# Altium PCB Copy of main - shifted.PcbDoc (part 12 of 15)
Units mil, origin at the board's own origin, x right, y up, seen from the top; angles counter-clockwise.
Board outline 8394.55 x 5164.44 mil, 7 copper layers (Top Layer 1, Layer 2, Layer 3, Unused, Layer 4_pow, Layer 5_gnd, Bottom 6+gnd), stack 46.112 mil thick; 363 components, 409 nets, 1750 pads, 991 vias.
Unrouted connection lines stored in the file: 111.
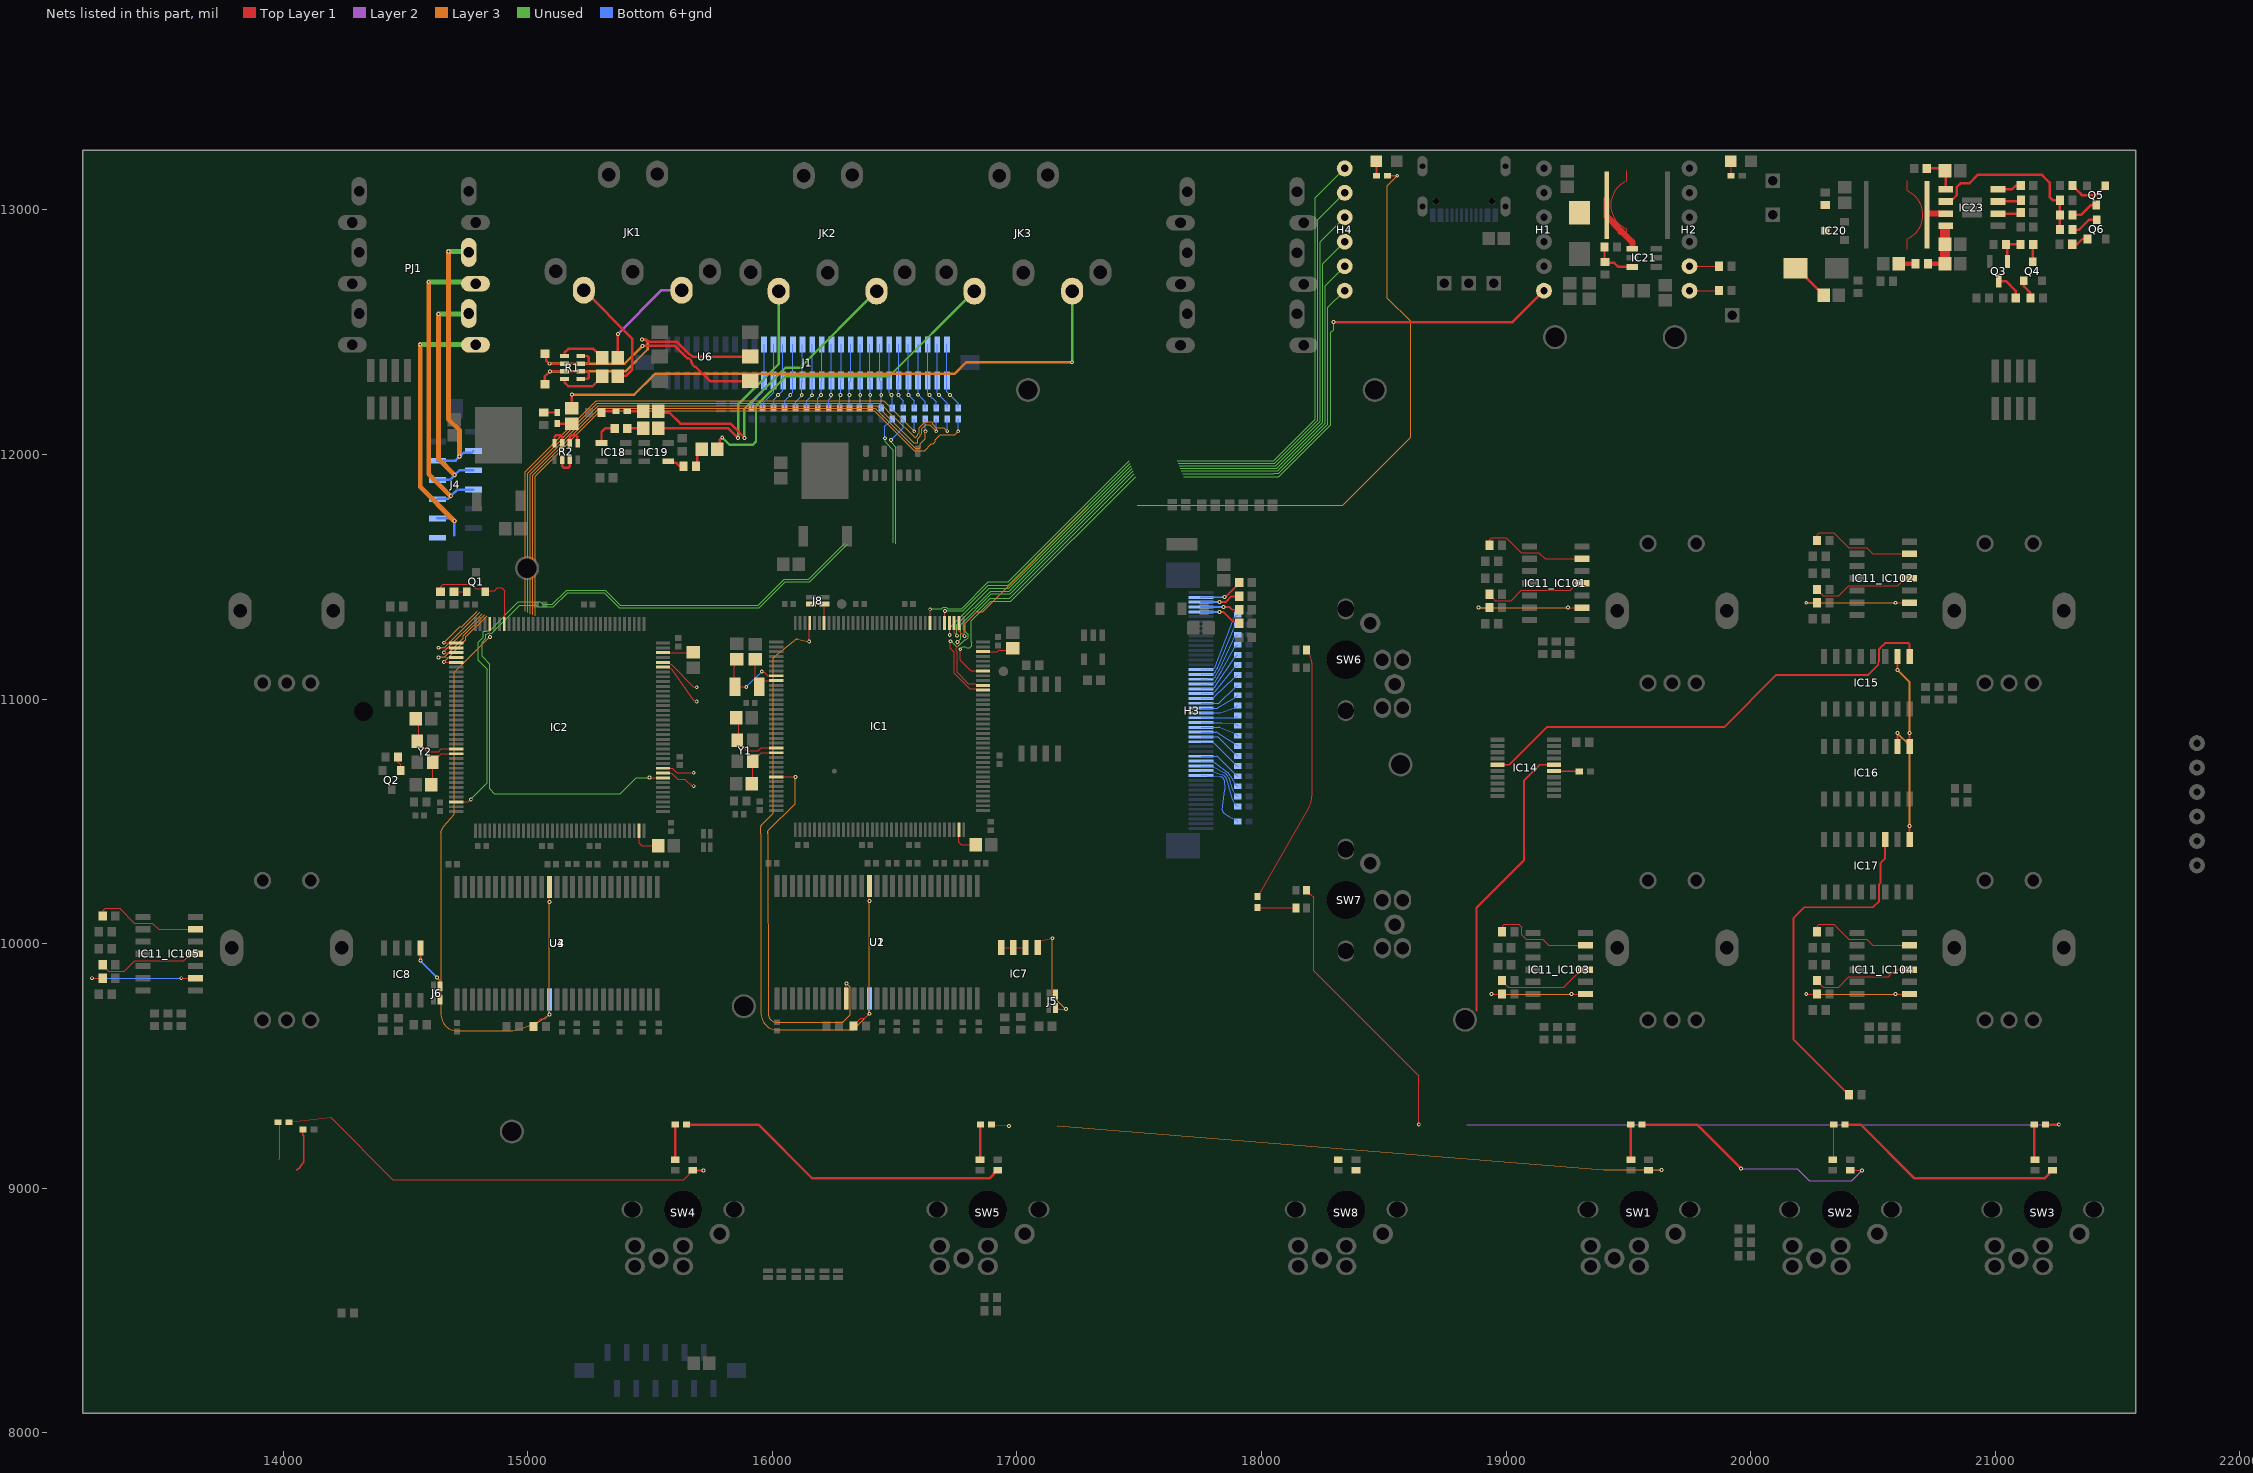
[diagram p15: the nets of this part, all layers, seen from the top]

## Via types
v1: diameter 15.75, hole 7.87, Top Layer 1 to Bottom 6+gnd, tented both sides, 923 vias
v2: diameter 27.56, hole 11.81, Top Layer 1 to Bottom 6+gnd, 45 vias
v3: diameter 23.62/23.62/23.62/23.62/23.62/23.62/23.62 (per signal layer), hole 12, Top Layer 1 to Bottom 6+gnd, tented top, 10 vias
v4: diameter 15.75, hole 7.87, Top Layer 1 to Bottom 6+gnd, 10 vias
v5: diameter 23.62/23.62/23.62/23.62/23.62/23.62/23.62 (per signal layer), hole 12, Top Layer 1 to Bottom 6+gnd, tented bottom, 3 vias

## Nets (pads, with @x,y where several pads share a name; then routed paths per layer and width w, separated by ;. In a path a pad name is that pad's centre, name@x,y a point inside that pad or via, vN(x,y) a via of type N, cw(c..) or ccw(c..) an arc to the next point about the centre after c; other vN are vias at no path point) (continued)
LDQM1_7: IC2.141 R9.2 U3.15 U4.15 | length 2842.9
  Top Layer 1 w5: IC2.141@14844.42,11307.38 14844.68,11307.12 14844.68,11254.74 v1(14844.89,11254.54) ; R9.2@15023.73,9660.61 15023.67,9662.58 15053.61,9692.53 15070.34,9692.53 v1(15088.11,9710.3) ; v1@15088.35,10170.19 U3.15@15088.35,10232.03
  Layer 3 w5: v1(14844.89,11254.54) 14844.76,11254.54 14699.86,11109.64 14699.85,11090.81 14699.82,10533.22 cw(c14694.82,10533.25) 14698.62,10530 14656.6,10480.75 ccw(c14698.42,10445.04) 14644.72,10456.9 14644.22,10454.64 ccw(c14678.4,10447.09) 14643.4,10447.14 14643.4,10444.91 14644.9,9709.3 14644.9,9709.17 ccw(c14710.27,9709.43) 14710.04,9644.05 14741.5,9643.94 ccw(c14741.61,9673.94) 14741.61,9643.94 14867.78,9643.94 14930.81,9644.1 ccw(c14930.63,9709.47) 14951.09,9647.38 14979.44,9656.72 ccw(c14962.12,9709.31) 14980.57,9657.1 15040.59,9678.3 ccw(c15035.6,9692.45) 15043.77,9679.87 15085.83,9707.19 ccw(c15083.11,9711.38) 15087.66,9709.31 v1(15088.11,9710.3) v1(15088.11,10169.94)
  Bottom 6+gnd w5: v1@15088.35,9709.56 U4.15@15088.35,9771.4
LDQM_6: IC1.141 R7.2 U1.15 U2.15 | length 3172.6
  Top Layer 1 w5: v1(16150.43,11235.1) 16151.57,11236.24 16151.57,11310.43 IC1.141@16152.72,11311.57 ; R7.2@16331.97,9663.82 16331.97,9665.79 16361.91,9695.73 16378.64,9695.73 v1(16396.41,9713.5) ; v1(16396.41,10174.13) U1.15@16396.41,10235.97 ; v1@16396.65,10174.38 U1.15@16396.65,10236.22
  Layer 3 w5: 16005.66,11170.57 16091.63,11241.21 ; 16005.66,11170.58 ccw(c16008.83,11166.71) 16003.83,11166.71 16003.83,10533.17 15953.16,10482.5 ccw(c15956.7,10478.97) 15951.7,10478.97 15951.7,10450.26 15953.2,9713.46 ccw(c16018.57,9713.62) 16018.32,9648.24 16049.71,9648.13 16284.62,9647.93 ; v1(16150.43,11235.1) 16104.43,11244.4 ; 16284.63,9647.93 16328.77,9647.93 ccw(c16328.77,9652.93) 16332.3,9649.4 v1(16396.41,9713.5) v1(16396.41,10174.13) ; 16091.63,11241.21 cw(c16101.39,11229.33) 16104.43,11244.4 ; 16091.63,11241.21 cw(c16101.39,11229.33) 16104.43,11244.4 ; 16091.63,11241.21 cw(c16101.39,11229.33) 16104.43,11244.4 ; 16091.63,11241.21 cw(c16101.39,11229.33) 16104.43,11244.4 ; 16091.63,11241.21 cw(c16101.39,11229.33) 16104.43,11244.4 ; 16091.63,11241.21 cw(c16101.39,11229.33) 16104.43,11244.4 ; 16091.63,11241.21 cw(c16101.39,11229.33) 16104.43,11244.4 ; 16091.63,11241.21 cw(c16101.39,11229.33) 16104.43,11244.4 ; 16091.63,11241.21 cw(c16101.39,11229.33) 16104.43,11244.4 ; 16091.63,11241.21 cw(c16101.39,11229.33) 16104.43,11244.4 ; 16091.63,11241.21 cw(c16101.39,11229.33) 16104.43,11244.4 ; 16091.63,11241.21 cw(c16101.39,11229.33) 16104.43,11244.4 ; 16091.63,11241.21 cw(c16101.39,11229.33) 16104.43,11244.4 ; 16091.63,11241.21 cw(c16101.39,11229.33) 16104.43,11244.4 ; 16091.63,11241.21 cw(c16101.39,11229.33) 16104.43,11244.4 ; 16091.63,11241.21 cw(c16101.39,11229.33) 16104.43,11244.4
  Bottom 6+gnd w5: v1@16396.65,9713.75 U2.15@16396.65,9775.59
LED_REAR: IC1.110 R138.2 | length 3222.5
  Top Layer 1 w5: IC1.110@16762.95,11311.57 16762.95,11279.49 v1(16785.24,11257.2)
  Top Layer 1 w8: R138.2@18515.28,13140 v1(18555,13140)
  Layer 3 w5: v1(16785.24,11257.2) 16785.24,11306.23 16836.29,11357.28 16859.6,11357.28 17294.34,11792.02 ; 17491.19,11792.02 18332.02,11792.02 18610,12070 18610,12545 18515,12640 18515,13100 v1(18555,13140)
MISO: IC14.5 IC15.9 | length 1980
  Top Layer 1 w8: IC14.5@18964.33,10731.61 19012.8,10731.61 19166.87,10885.69 19891.87,10885.69 20105,11098.82 20481.04,11098.82 20521.8,11139.58 20521.8,11150.61 20525,11153.82 20525,11204.85 20538.58,11218.44 20539.62,11218.44 20550,11228.82 20645,11228.82 20650,11223.82 IC15.9@20650,11173.82
MOSI: IC14.16 | length 1170.6
  Top Layer 1 w8: 18878.99,9726.04 18878.99,10146.05 19073,10340.05 19073,10666.82 19137.8,10731.61 IC14.16@19195.67,10731.61
NetC1_1: C1.1 IC1.106 | length 127.8
  Top Layer 1 w5: IC1.106@16860.91,11193.94 16919.98,11193.94 16925.55,11199.51 16975.33,11199.51 C1.1@16983.15,11207.32
NetC2_1: C2.1 IC2.106 | length 127.8
  Top Layer 1 w5: IC2.106@15552.67,11189.75 15661.52,11189.75 C2.1@15674.91,11203.13
NetC3_2: C3.2 IC1.23 Y1.1 | length 277.5
  Top Layer 1 w5: C3.2@15861.65,10923.82 15861.65,10837.13 Y1.1@15856.65,10832.13 15856.65,10828.19 15896.02,10788.82 15943.15,10788.82 15954.57,10800.24 IC1.23@16015.39,10800.24
NetC4_2: C4.2 IC2.23 Y2.1 | length 277.5
  Top Layer 1 w5: C4.2@14553.41,10919.63 14553.41,10832.94 Y2.1@14548.41,10827.94 14548.41,10824 14587.78,10784.63 14634.91,10784.63 14646.33,10796.05 IC2.23@14707.15,10796.05
NetC5_2: C5.2 IC1.24 Y1.3 | length 204.3
  Top Layer 1 w5: C5.2@15919.65,10653.82 Y1.3@15919.65,10745.51 15919.65,10749.45 15940.77,10770.57 15944.71,10770.57 15954.69,10780.55 IC1.24@16015.39,10780.55
NetC6_2: C6.2 IC2.24 Y2.3 | length 204.3
  Top Layer 1 w5: C6.2@14611.41,10649.63 Y2.3@14611.41,10741.32 14611.41,10745.26 14632.53,10766.38 14636.46,10766.38 14646.44,10776.36 IC2.24@14707.15,10776.36
NetC9_2: C9.2 IC1.71 | length 135.2
  Top Layer 1 w5: IC1.71@16763.15,10466.26 IC1.71@16762.95,10466.06 16762.95,10414.01 16773.15,10403.82 C9.2@16841.65,10403.82
NetC10_2: C10.2 IC2.71 | length 135
  Top Layer 1 w5: IC2.71@15454.71,10461.87 15454.71,10409.83 15464.91,10399.63 C10.2@15533.41,10399.63
NetC67_2: C67.2 IC1.8 Y3.2 | length 296.6
  Top Layer 1 w5: Y3.2@15843.9,11052.67 15843.9,11134.44 C67.2@15854.13,11144.66 ; Y3.2@15847.02,11050.2 15847.49,11049.74 v1(15892.98,11049.74) ; v1(15956.45,11112.31) 15958.4,11110.36 15966.24,11110.36 15981.08,11095.51 IC1.8@16015.39,11095.51
  Bottom 6+gnd w5: v1@15893.98,11049.74 v1@15956.45,11112.21
NetC68_2: C68.2 IC1.9 Y3.1 | length 182.6
  Top Layer 1 w5: C68.2@15929.56,11145 15929.56,11065.43 15942.33,11052.67 15942.33,11056.67 15961.48,11075.83 IC1.9@16015.39,11075.83
NetC92_2: C92.2 D2.2 IC20.3 R18.2 | length 164
  Top Layer 1 w10: D2.2@20183.35,12762.1 20189.26,12762.1 20226.58,12724.78 20226.58,12723.54 20298.15,12651.97 C92.2@20298.15,12650
  Top Layer 1 w25: R18.2@20304.65,13020 R18.2@20304.96,13019.68 ; IC20.3@20304.96,12915.32 IC20.3@20305.28,12915
NetC93_2: C93.2 C94.2 IC23.8 R53.2 | length 210
  Top Layer 1 w20: R53.2@20724.65,12780 C94.2@20794.65,12780
  Top Layer 1 w40: C94.2@20794.65,12780 C93.2@20794.65,12860 20794.65,12920
NetC95_2: C95.2 R53.1 | length 68.8
  Top Layer 1 w20: C95.2@20604.65,12780 R53.1@20673.46,12780
NetC96_2: C96.2 IC23.5 R125.1 | length 154.9
  Top Layer 1 w10: R125.1@20720.24,13170 20784.65,13170 C96.2@20794.65,13160 20797.87,13156.77 IC23.5@20797.87,13085
NetD1_1: D1.1 R1.7 U6.2 | length 1087.7
  Top Layer 1 w10: D1.1@15070,12287.99 15070,12320 v1(15090,12340) R1.7@15150,12340 ; v1(15466.75,12470.31) 15485.1,12470.31 15494.97,12460.44 15609.76,12460.44 15661.14,12409.06 15664.33,12409.06 15673.38,12400 U6.2@15910.04,12400
  Layer 3 w10: v1(15090,12340) 15400,12340 15490.57,12430.57 15490.57,12458.94 15480.3,12469.21 15467.85,12469.21 v1(15466.75,12470.31)
NetD1_2: D1.2 R1.6 U6.1 | length 1028.6
  Top Layer 1 w10: D1.2@15070,12412.01 15074.85,12407.16 15074.85,12385.15 v1(15088.5,12371.5) R1.6@15150,12371.5 ; v1(15469.37,12444.37) 15470.44,12445.44 15599.56,12445.44 15650.94,12394.06 15658.11,12394.06 15668.58,12383.58 15668.58,12376.42 15672.2,12372.8 15672.2,12368.78 15682.68,12358.31 15686.69,12358.31 15745,12300 U6.1@15910.04,12300
  Layer 3 w10: v1(15088.5,12371.5) 15396.5,12371.5 v1(15469.37,12444.37)
NetD3_1: D3.1 IC21.1 L1.2 | length 252.7
  Top Layer 1 w25: L1.2@19410.79,13044.99 19410.79,12974.01 19469.03,12915.77 ; 19469.03,12909.99 19469.03,12915.77 ; IC21.1@19516.38,12841.81 19516.38,12868.42 19469.03,12915.77
NetD4_1: D4.1 R132.1 | length 60.6
  Top Layer 1 w5: D4.1@19918.66,13200 19920,13198.66 R132.1@19920,13140
NetD5_1: D5.1 R138.1 | length 60
  Top Layer 1 w8: R138.1@18470,13140 D5.1@18470,13200
NetFB1_1: FB1.1 JK1.5 | length 433.1
  Top Layer 1 w10: FB1.1@15367.99,12395 v1(15367.99,12492.99)
  Layer 2 w10: v1(15367.99,12492.99) 15547,12672 JK1.5@15628.93,12672
NetFB1_2: FB1.2 R1.5 | length 191.1
  Top Layer 1 w10: R1.5@15150,12402.99 15150,12416.5 15165.61,12432.11 15268.27,12432.11 15282.82,12417.56 15284.41,12417.56 15305,12396.97 FB1.2@15305,12395.38
NetFB2_1: FB2.1 JK1.4 | length 477.9
  Top Layer 1 w10: JK1.4@15228.93,12672 15427.83,12473.1 15427.83,12425.39 15427.83,12347.83 15402.72,12322.72 15370.72,12322.72 FB2.1@15367.99,12320
NetFB2_2: FB2.2 R1.8 | length 192.9
  Top Layer 1 w10: R1.8@15150,12308.5 15150,12295 15165.61,12279.39 15264.39,12279.39 15282.44,12297.44 15284.41,12297.44 15305,12318.03 FB2.2@15305,12320
NetFB3_1: FB3.1 R102.2 | length 65
  Top Layer 1 w10: R102.2@15406.2,12107.11 FB3.1@15471.2,12107.11
NetFB3_2: FB3.2 JK2.4 | length 1010.1
  Top Layer 1 w10: FB3.2@15534.19,12107.11 15820.56,12107.11 v1(15859.46,12068.2)
  Unused w10: v1(15859.46,12068.2) 15859.46,12204.46 16025.93,12370.93 JK2.4@16025.93,12668
NetFB4_1: FB4.1 R104.2 | length 65
  Top Layer 1 w10: R104.2@15406.2,12177.11 FB4.1@15471.2,12177.11
NetFB4_2: FB4.2 JK2.5 | length 1256.5
  Top Layer 1 w10: FB4.2@15534.19,12177.11 15539.6,12171.7 15578.34,12171.7 15623.74,12126.3 15828.7,12126.3 15882.53,12072.47 15882.53,12072.14 15885.4,12069.27 v1(15885.4,12067.71)
  Unused w10: v1(15885.4,12067.71) 15885,12068.11 15885,12185.74 16054.26,12355 16112.93,12355 JK2.5@16425.93,12668
NetFB5_1: FB5.1 R105.2 | length 79.9
  Top Layer 1 w10: R105.2@15687.38,11952.31 15693.52,11958.45 15693.52,12004.63 FB5.1@15711.2,12022.31
NetFB5_2: FB5.2 JK3.4 | length 1449
  Top Layer 1 w5: FB5.2@15771.31,12025.19 FB5.2@15774.19,12022.31
  Top Layer 1 w10: FB5.2@15774.19,12022.31 15784.01,12032.12 15784.01,12059.01 v1(15795,12070)
  Unused w10: v1(15795,12070) 15825,12040 15920.28,12040 15932.87,12052.6 15932.87,12197.87 16055,12320 16477.93,12320 JK3.4@16825.93,12668
NetFB6_1: FB6.1 R140.2 | length 60.1
  Top Layer 1 w10: R140.2@15120,12126.54 15179.72,12126.54 FB6.1@15180,12126.81
NetFB6_2: FB6.2 JK3.5 | length 2449
  Top Layer 1 w10: v1(15180,12245) FB6.2@15180,12189.8 FB6.2@15180.93,12190.73 ; JK3.5@17225,12667.07 JK3.5@17225.93,12668
  Unused w10: v1(17225.36,12377.26) 17225.36,12667.43 JK3.5@17225.93,12668
  Layer 3 w10: v1(15180,12245) 15435,12245 15520,12330 16745,12330 16792.26,12377.26 v1(17225.36,12377.26)
NetH2_5: H2.5 R135.2 | length 120.2
  Top Layer 1 w5: H2.5@19749.81,12770 R135.2@19870,12770
NetH2_6: H2.6 R136.2 | length 120.2
  Top Layer 1 w5: H2.6@19749.81,12670 R136.2@19870,12670
NetH3_12: H3.12 R137.1 | length 306.1
  Bottom 6+gnd w5: H3.12@17753.15,10687.6 17801.83,10684.19 17833.17,10682.18 cw(c17832.19,10666.84) 17847.52,10667.98 17850.32,10630.14 cw(c17834.98,10629) 17850.22,10626.99 17839.77,10548.01 ccw(c17855.01,10545.99) 17846.48,10533.2 17865.53,10520.5 ccw(c17871.08,10528.82) 17867.09,10519.65 17890.89,10509.31 R137.1@17903.15,10500
NetH3_13: H3.13 R40.1 | length 238.9
  Bottom 6+gnd w5: H3.13@17753.15,10707.28 17801.83,10703.88 17840.31,10690.88 cw(c17832.19,10666.84) 17856.57,10673.86 17881.18,10588.3 ccw(c17888.39,10590.38) 17881.81,10586.78 17890.89,10570.19 R40.1@17903.15,10560.87
NetH3_14: H3.14 R41.1 | length 215.9
  Bottom 6+gnd w5: H3.14@17753.15,10726.97 17801.83,10723.56 17849.06,10697.93 cw(c17832.19,10666.84) 17865.89,10677.58 17881.24,10629.42 ccw(c17888.39,10631.69) 17881.81,10628.09 17890.89,10611.5 R41.1@17903.15,10602.19
NetH3_15: H3.15 R54.1 | length 194.2
  Bottom 6+gnd w5: H3.15@17753.15,10746.65 17801.83,10743.25 17808.28,10739.25 cw(c17804.33,10732.87) 17808.66,10739 17858.36,10703.91 cw(c17832.19,10666.84) 17872.61,10687.44 17881.7,10669.6 ccw(c17888.39,10673.01) 17881.81,10669.41 17890.89,10652.82 R54.1@17903.15,10643.5
NetH3_16: H3.16 R55.1 | length 182.8
  Bottom 6+gnd w5: H3.16@17753.15,10766.34 17816.61,10766.34 cw(c17816.61,10761.34) 17820.13,10764.89 17890.89,10694.13 R55.1@17903.15,10684.82
NetH3_19: H3.19 R56.1 | length 188.6
  Bottom 6+gnd w5: H3.19@17753.15,10825.39 17801.83,10821.99 17808.28,10817.99 cw(c17804.33,10811.61) 17809.64,10816.91 17890.89,10735.45 R56.1@17903.15,10726.14
NetH3_20: H3.20 R57.1 | length 181.2
  Bottom 6+gnd w5: H3.20@17753.15,10845.08 17820.5,10845.08 cw(c17820.5,10840.08) 17824.02,10843.63 17890.89,10776.76 R57.1@17903.15,10767.45
NetH3_21: H3.21 R58.1 | length 166.3
  Bottom 6+gnd w5: H3.21@17753.15,10864.76 17813.44,10864.76 cw(c17813.44,10859.76) 17816.06,10864.03 17890.89,10818.08 R58.1@17903.15,10808.77
NetH3_22: H3.22 R59.1 | length 157.9
  Bottom 6+gnd w5: H3.22@17753.15,10884.45 17827.11,10884.45 cw(c17827.11,10879.45) 17828.94,10884.1 17890.89,10859.4 R59.1@17903.15,10850.08
NetH3_23: H3.23 R60.1 | length 153.2
  Bottom 6+gnd w5: H3.23@17753.15,10904.13 17837.92,10904.13 cw(c17837.92,10899.13) 17838.21,10904.13 17890.89,10900.71 R60.1@17903.15,10891.4
NetH3_24: H3.24 R61.1 | length 152.9
  Bottom 6+gnd w5: H3.24@17753.15,10923.82 17890.89,10923.82 R61.1@17903.15,10932.71
NetH3_25: H3.25 R62.1 | length 156.7
  Bottom 6+gnd w5: H3.25@17753.15,10943.5 17829.02,10943.5 ; 17829.06,10943.51 ccw(c17828.99,10948.51) 17830.63,10943.78 17890.89,10964.72 R62.1@17903.15,10974.03
NetH3_26: H3.26 R63.1 | length 165.1
  Bottom 6+gnd w5: H3.26@17753.15,10963.19 17819.13,10963.19 ccw(c17819.1,10968.19) 17821.7,10963.92 17890.89,11006.04 R63.1@17903.15,11015.35
NetH3_27: H3.27 R64.1 | length 179.6
  Bottom 6+gnd w5: H3.27@17753.15,10982.87 17824.34,10982.87 ; 17824.37,10982.88 ccw(c17824.31,10987.88) 17827.84,10984.34 17890.89,11047.35 R64.1@17903.15,11056.66
NetH3_28: H3.28 R65.1 | length 185.9
  Bottom 6+gnd w5: H3.28@17753.15,11002.56 17801.83,11005.97 17808.28,11009.96 ccw(c17804.33,11016.34) 17809.51,11010.92 17890.89,11088.67 R65.1@17903.15,11097.98
NetH3_29: H3.29 R66.1 | length 201.8
  Bottom 6+gnd w5: H3.29@17753.15,11022.24 17801.83,11025.65 17808.28,11029.65 ccw(c17804.33,11036.03) 17810.14,11031.28 17890.89,11129.98 R66.1@17903.15,11139.29
NetH3_30: H3.30 R67.1 | length 219.2
  Bottom 6+gnd w5: H3.30@17753.15,11041.93 17801.83,11045.34 17808.28,11049.33 ccw(c17804.33,11055.71) 17810.56,11051.53 17890.89,11171.3 R67.1@17903.15,11180.61
NetH3_31: H3.31 R68.1 | length 237.6
  Bottom 6+gnd w5: H3.31@17753.15,11061.61 17801.83,11065.02 17808.28,11069.02 ccw(c17804.33,11075.4) 17810.79,11071.59 17819.4,11086.19 17836.63,11115.4 ccw(c17804.33,11134.45) 17837.05,11116.12 17890.89,11212.61 R68.1@17903.15,11221.92
NetH3_32: H3.32 R69.1 | length 256.9
  Bottom 6+gnd w5: H3.32@17753.15,11081.3 17801.83,11084.71 17808.28,11088.7 ccw(c17804.33,11095.08) 17810.79,11091.27 17828.02,11120.48 ccw(c17804.33,11134.45) 17829.33,11122.98 17881.57,11236.86 cw(c17888.39,11233.74) 17881.81,11237.34 17890.89,11253.93 R69.1@17903.15,11263.24
NetH3_33: H3.33 R70.1 | length 276.6
  Bottom 6+gnd w5: H3.33@17753.15,11100.98 17801.83,11104.39 17808.28,11108.39 ccw(c17804.33,11114.77) 17810.79,11110.96 17819.4,11125.56 ccw(c17804.33,11134.45) 17820.55,11127.87 17881.44,11277.87 cw(c17888.39,11275.05) 17881.81,11278.65 17890.89,11295.25 R70.1@17903.15,11304.56
NetH3_34: H3.34 R71.1 | length 296.5
  Bottom 6+gnd w5: H3.34@17753.15,11120.67 17801.83,11124.08 17808.28,11128.07 ccw(c17804.33,11134.45) 17811.36,11131.82 17881.36,11319 cw(c17888.39,11316.37) 17881.81,11319.97 17890.89,11336.56 R71.1@17903.15,11345.87
NetH3_46: H3.46 R42.1 | length 174.4
  Top Layer 1 w8: v1(17827.99,11356.23) 17844.32,11356.23 17883.57,11316.98 17901.9,11316.98 R42.1@17908.57,11310.32
  Bottom 6+gnd w8: H3.46@17753.15,11356.89 17800.33,11356.23 v1(17827.99,11356.23)
NetH3_47: H3.47 R43.1 | length 160.7
  Top Layer 1 w8: v1(17844.02,11376.39) 17844.61,11376.98 17868.57,11376.98 17880.23,11365.32 R43.1@17908.57,11365.32
  Bottom 6+gnd w8: H3.47@17753.15,11376.57 17753.35,11376.78 17843.62,11376.78 v1(17844.02,11376.39)
NetH3_48: H3.48 R44.1 | length 165.4
  Top Layer 1 w8: v1(17828.57,11396.98) 17853.57,11396.98 17876.9,11420.32 R44.1@17908.57,11420.32
  Bottom 6+gnd w8: H3.48@17753.15,11396.26 17827.84,11396.26 v1(17828.57,11396.98)
NetH3_49: H3.49 R45.1 | length 182.9
  Top Layer 1 w8: v1(17848.57,11416.98) 17850.05,11418.47 17853.79,11418.47 17895.84,11460.51 17895.84,11464.25 R45.1@17908.57,11476.98
  Bottom 6+gnd w8: H3.49@17753.15,11415.94 17753.67,11416.46 17848.05,11416.46 v1(17848.57,11416.98)
NetIC1_138: IC1.138 J8.1 J8.3 | length 132.9
  Top Layer 1 w5: J8.3@16158.03,11388.82 J8.1@16213.15,11388.82 16211.77,11387.44 IC1.138@16211.77,11311.57
NetIC2_81: IC2.81 TP4.1 | length 147.8
  Top Layer 1 w5: IC2.81@15552.67,10697.62 15589.35,10697.62 15613.72,10673.24 15642.26,10673.24 15671.69,10643.82 v1(15678.15,10643.82)
NetIC2_82: IC2.82 TP3.1 | length 133.1
  Top Layer 1 w5: IC2.82@15552.67,10717.31 15589.66,10717.31 15608.15,10698.82 v1(15678.15,10698.82)
NetIC2_103: IC2.103 TP6.1 | length 206.6
  Top Layer 1 w5: IC2.103@15552.67,11130.69 15579.2,11127.29 15585.65,11123.29 cw(c15581.7,11116.91) 15587.82,11121.25 15678.15,10993.82 v1(15690.46,10989.49)
NetIC2_104: IC2.104 TP5.1 | length 178.7
  Top Layer 1 w5: IC2.104@15552.67,11150.38 15579.2,11146.97 15585.65,11142.97 cw(c15581.7,11136.6) 15587.06,11141.85 15678.15,11048.82 v1(15690.46,11048.51)
NetIC2_138: IC2.138 Q1.2 R109.1 | length 446.1
  Top Layer 1 w5: R109.1@14643.15,11438.82 14644.45,11440.12 14644.45,11460.12 14653.15,11468.82 14769.23,11468.82 14786.79,11451.26 14813.74,11451.26 Q1.2@14825.55,11439.45 14829.92,11443.82 14865.17,11443.82 14875.72,11454.36 14894.31,11454.36 14905.58,11443.1 14905.58,11309.43 IC2.138@14903.53,11307.38
NetIC7_1: IC7.1 J5.2 J5.4 | length 486.4
  Top Layer 1 w5: IC7.1@17085.24,9983.98 17095.53,10011.5 v1(17145.24,10022.2) ; J5.4@17157.8,9737.09 J5.2@17157.8,9792.2 ; J5.4@17164.02,9737.2 17169.02,9732.2 v1(17200.24,9732.2)
  Layer 3 w5: v1(17145.24,10022.2) 17145.24,9787.2 v1(17200.24,9732.2)
NetIC7_2: IC7.2 IC7.3 IC7.4 | length 100
  Top Layer 1 w5: IC7.4@16935.24,9983.98 IC7.2@17035.24,9983.98
NetIC8_1: IC8.1 J6.2 J6.4 | length 245.9
  Top Layer 1 w8: v1(14560.48,9931.26) 14560.48,9981.03 IC8.1@14561.48,9982.03 ; v1(14628.48,9861.26) 14641.48,9848.26 J6.2@14641.48,9825.26 J6.4@14641.48,9770.14
  Bottom 6+gnd w8: v1(14560.48,9931.26) 14560.48,9930.26 14628.48,9862.26 v1(14628.48,9861.26)
NetIC14_15: IC14.15 R76.2 | length 105.2
  Top Layer 1 w8: IC14.15@19195.67,10706.02 19196.77,10704.92 19298.9,10704.92 R76.2@19300,10703.82
NetIC15_10: IC15.10 IC16.9 | length 388.4
  Top Layer 1 w8: v1(20600,11119.25) IC15.10@20600,11173.82 ; IC16.9@20650,10806.1 v1(20650,10860.67)
  Layer 3 w8: v1(20600,11119.25) 20650,11069.25 v1(20650,10860.67)
NetIC16_10: IC16.10 IC17.9 | length 509.8
  Top Layer 1 w8: IC16.10@20600,10806.1 v1(20600,10860.67) ; IC17.9@20650,10426.1 v1(20650,10480.67)
  Layer 3 w8: v1(20600,10860.67) 20650,10810.67 v1(20650,10480.67)
NetIC17_11: IC17.11 R86.1 | length 1457.2
  Top Layer 1 w8: R86.1@20401.64,9382.18 20175,9608.82 20175,10103.82 20220,10148.82 20500,10148.82 20525,10173.82 20525,10242.57 20530,10247.57 20530,10328.82 20550,10348.82 IC17.11@20550,10426.1
NetIC18_4: IC18.4 R102.1 | length 105
  Top Layer 1 w10: IC18.4@15301.2,12047.11 15301.2,12092.11 15316.2,12107.11 R102.1@15355.02,12107.11
NetIC19_4: IC19.4 R105.1 | length 69.9
  Top Layer 1 w10: IC19.4@15574.63,11972.31 15579.94,11966.99 15605.96,11966.99 15618.58,11954.37 15634.13,11954.37 R105.1@15636.2,11952.31
NetIC21_3: IC21.3 R17.1 R20.2 | length 182.3
  Top Layer 1 w10: R20.2@19402.28,12848.61 19402.28,12789.93 19407.8,12784.4 19441.75,12784.4 19459.15,12767 IC21.3@19516.38,12767
NetIC23_2: IC23.2 R52.1 | length 95.3
  Top Layer 1 w10: IC23.2@21011.42,12985 21099.65,12985 R52.1@21104.65,12990
NetIC23_3: IC23.3 R127.1 | length 95.3
  Top Layer 1 w10: IC23.3@21011.42,13035 21099.65,13035 R127.1@21104.65,13040
NetIC23_4: IC23.4 R128.2 | length 99.4
  Top Layer 1 w10: IC23.4@21011.42,13085 21069.65,13085 21084.65,13100 R128.2@21104.65,13100
NetIC23_6: IC23.6 R129.2 R130.2 R131.2 | length 729.6
  Top Layer 1 w10: IC23.6@20797.87,13035 20806.65,13043.78 20826.64,13043.78 20842.89,13060.03 20842.89,13093.25 20859.65,13110 20895.7,13110 20930.07,13144.38 21189.57,13144.38 21212.72,13121.22 21212.85,13121.22 21223.43,13110.65 21223.43,13051.22 21234.65,13040 R129.2@21264.65,13040 R130.2@21264.65,12980 R131.2@21264.65,12920
NetIC23_7: IC23.7 L2.1 | length 75.3
  Top Layer 1 w25: L2.1@20724.65,12990 20729.65,12985 IC23.7@20797.87,12985
NetJ1_1: J1.1 J1.2 R141.2 | length 279.2
  Bottom 6+gnd w5: J1.2@16713.7,12450 J1.1@16713.7,12302.36 16713.7,12256.3 v1(16726.81,12243.19) 16760,12210 R141.2@16760,12190
NetJ1_3: J1.3 J1.4 R142.2 | length 276.8
  Bottom 6+gnd w5: J1.4@16674.33,12450 J1.3@16674.33,12302.36 16674.33,12250.67 v1(16681.81,12243.19) 16715,12210 R142.2@16715,12190
NetJ1_5: J1.5 J1.6 R143.2 | length 274.5
  Bottom 6+gnd w5: J1.6@16634.96,12450 J1.5@16634.96,12302.36 16634.96,12250.04 v1(16641.81,12243.19) 16670,12215 R143.2@16670,12190
NetJ1_7: J1.7 J1.8 R144.2 | length 272.2
  Bottom 6+gnd w5: J1.8@16595.59,12450 J1.7@16595.59,12302.36 v1(16595.59,12244.41) 16625,12215 R144.2@16625,12190
NetJ1_9: J1.9 J1.10 R145.2 | length 269.8
  Bottom 6+gnd w5: J1.10@16556.22,12450 J1.9@16556.22,12302.36 v1(16556.22,12243.78) 16580,12220 R145.2@16580,12190
NetJ1_11: J1.11 J1.12 R146.2 | length 269.1
  Bottom 6+gnd w5: J1.12@16516.85,12450 J1.11@16516.85,12302.36 16515,12300.51 v1(16515,12243.19) 16515,12240 16535,12220 R146.2@16535,12190
NetJ1_13: J1.13 J1.14 R147.2 | length 265.2
  Bottom 6+gnd w5: J1.14@16477.48,12450 J1.13@16477.48,12302.36 16477.48,12252.52 v1(16486.81,12243.19) 16490,12240 R147.2@16490,12190
NetJ1_15: J1.15 J1.16 R148.2 | length 262.9
  Bottom 6+gnd w5: J1.16@16438.11,12450 J1.15@16438.11,12302.36 16445,12295.47 v1(16445,12243.19) R148.2@16445,12190
NetJ1_17: J1.17 J1.18 R149.2 | length 260.5
  Bottom 6+gnd w5: J1.18@16398.74,12450 J1.17@16398.74,12302.36 16400,12301.1 v1(16400,12243.19) R149.2@16400,12190
NetJ1_19: J1.19 J1.20 R150.2 | length 261.8
  Bottom 6+gnd w5: R150.2@16355,12190 16359.37,12194.37 v1(16359.37,12243.19) J1.19@16359.37,12302.36 J1.20@16359.37,12450
NetJ1_21: J1.21 J1.22 R151.2 | length 262.1
  Bottom 6+gnd w5: R151.2@16315,12190 v1(16315,12243.19) 16315,12297.36 J1.21@16320,12302.36 J1.22@16320,12450
NetJ1_23: J1.23 J1.24 R152.2 | length 262.3
  Bottom 6+gnd w5: R152.2@16275,12190 16275,12240 v1(16278.19,12243.19) 16280,12245 16280,12301.73 J1.23@16280.63,12302.36 J1.24@16280.63,12450
NetJ1_25: J1.25 J1.26 R153.2 | length 264.7
  Bottom 6+gnd w5: R153.2@16230,12190 16230,12225 16240,12235 v1(16240,12243.19) 16240,12301.1 J1.25@16241.26,12302.36 J1.26@16241.26,12450
NetJ1_27: J1.27 J1.28 R154.2 | length 267
  Bottom 6+gnd w5: R154.2@16185,12190 16185,12230 v1(16198.19,12243.19) 16200,12245 16200,12300.47 J1.27@16201.89,12302.36 J1.28@16201.89,12450
NetJ1_29: J1.29 J1.30 R155.2 | length 269.3
  Bottom 6+gnd w5: R155.2@16140,12190 16140,12220 v1(16162.52,12242.52) J1.29@16162.52,12302.36 J1.30@16162.52,12450
NetJ1_31: J1.31@16123.15,12302.36 J1.32@16123.15,12450 R156.2 | length 271.7
  Bottom 6+gnd w5: R156.2@16095,12190 16095,12215 16120,12240 v1(16120,12243.19) 16120,12299.21 J1.31@16123.15,12302.36 ; J1.31@16121.57,12300.79 J1.32@16121.57,12448.43
NetJ1_33: J1.33 J1.34 R157.2 | length 274
  Bottom 6+gnd w5: R157.2@16050,12190 16050,12220 v1(16073.19,12243.19) 16083.78,12253.78 J1.33@16083.78,12302.36 J1.34@16083.78,12450
NetJ1_35: J1.35 J1.36 R158.2 | length 276.3
  Bottom 6+gnd w5: R158.2@16005,12190 16005,12225 v1(16023.19,12243.19) 16041.37,12261.37 16041.37,12299.33 J1.35@16044.41,12302.36 ; J1.35@16042.89,12300.84 J1.36@16042.89,12448.48
NetJ1_37: J1.37 J1.38 R159.2 | length 278.7
  Bottom 6+gnd w5: R159.2@15960,12190 15960,12210 16005.04,12255.04 J1.37@16005.04,12302.36 J1.38@16005.04,12450
NetJ1_39: J1.39 J1.40 R160.2 | length 281
  Bottom 6+gnd w5: R160.2@15915,12190 15915,12210.53 15963.4,12258.93 15963.4,12300.09 J1.39@15965.67,12302.36 J1.40@15965.67,12450
NetQ1_1: Q1.1 R106.2 | length 52.9
  Top Layer 1 w5: R106.2@14698.15,11438.82 14750.12,11438.82 Q1.1@14750.75,11439.45
NetQ2_1: Q2.1 R107.2 | length 66.7
  Top Layer 1 w5: R107.2@14465.79,10768.82 14465.79,10746.18 14480.55,10731.42 Q2.1@14480.55,10708.19
NetQ3_1: Q3.1 R21.1 R38.2 | length 132.5
  Top Layer 1 w10: Q3.1@21050.02,12789.37 21050.02,12853.37 R21.1@21044.02,12859.37 R38.2@21104.02,12859.37
NetQ3_3: Q3.3 R39.2 | length 116.6
  Top Layer 1 w10: Q3.3@21014.02,12709.37 21044.02,12709.37 21084.02,12669.37 R39.2@21084.02,12639.37
NetQ4_1: Q4.1 R50.1 | length 82
  Top Layer 1 w10: Q4.1@21116.61,12710 21116.61,12688.55 21144.02,12661.15 R50.1@21144.02,12639.37
NetQ4_3: Q4.3 R38.1 | length 71.1
  Top Layer 1 w10: Q4.3@21154.02,12788.74 21154.02,12858.19 R38.1@21155.2,12859.37
NetQ5_1: Q5.1 R133.2 | length 170.3
  Top Layer 1 w10: R133.2@21315.83,13100 21315.83,13098.03 21327.56,13086.3 21329.3,13086.3 21354.63,13060.97 21414.27,13060.97 21439.33,13086.02 21441.3,13086.02 21452.05,13096.77 Q5.1@21452.05,13098.74
NetQ5_3: Q5.3 R130.1 | length 115.4
  Top Layer 1 w10: R130.1@21315.83,12980 21350.97,12980 21390.97,13020 Q5.3@21414.65,13020
NetQ6_1: Q6.1 R134.2 | length 71.4
  Top Layer 1 w10: R134.2@21314.65,12860 21334.65,12860 21355.91,12881.26 Q6.1@21377.24,12881.26
NetQ6_3: Q6.3 R131.1 | length 115.4
  Top Layer 1 w10: R131.1@21315.83,12920 21343.71,12920 21383.71,12960 Q6.3@21414.65,12960
NetR1_1: R1.1 R1.2 | length 89.9
  Top Layer 1 w10: R1.1@15216.93,12308.5 15217.68,12309.25 15243.93,12309.25 15249.79,12315.11 15249.79,12334.14 15243.93,12340 R1.2@15216.93,12340
NetR1_3: R1.3 R1.4 | length 89.9
  Top Layer 1 w10: R1.3@15216.93,12371.5 15217.68,12372.24 15243.93,12372.24 15249.79,12378.1 15249.79,12397.13 15243.93,12402.99 R1.4@15216.93,12402.99
NetR2_2: R2.2 R2.3 | length 89.9
  Top Layer 1 w10: R2.2@15140.45,11978.65 15141.2,11977.9 15141.2,11951.64 15147.06,11945.78 15166.09,11945.78 15171.95,11951.64 R2.3@15171.95,11978.65
NetR2_5: R2.5 R2.6 | length 89.9
  Top Layer 1 w10: R2.6@15171.95,12045.57 15171.95,12072.58 15177.81,12078.44 15196.84,12078.44 15202.7,12072.58 15202.7,12046.32 R2.5@15203.45,12045.57
NetR2_7: R2.7 R2.8 | length 89.9
  Top Layer 1 w10: R2.8@15108.96,12045.57 15108.96,12072.58 15114.82,12078.44 15133.85,12078.44 15139.71,12072.58 15139.71,12046.32 R2.7@15140.45,12045.57
NetR3_1: R3.1 SW8.3 | length 180.8
  Top Layer 1 w6: 14053.74,9075.38 14057.68,9075.38 14068.45,9086.16 14068.45,9090.59 14083.15,9105.29 14083.15,9215 14079.8,9218.35 14079.8,9239.29 R3.1@14080.51,9240
NetR4_1: R4.1 SW5.3 | length 1380.1
  Top Layer 1 w10: R4.1@15648.42,9260 15943.15,9260 16163.15,9040 16887.67,9040 16905.96,9058.28 16905.96,9062.22 16917.24,9073.5 SW5.3@16921.17,9073.5
NetR4_2: R4.2 SW4.1 | length 143.5
  Top Layer 1 w10: SW4.1@15602.44,9116.81 15603.15,9117.52 R4.2@15603.15,9260
NetR8_1: R8.1 SW4.3 | length 1820
  Top Layer 1 w5: R8.1@14023.42,9270 14035.69,9271.44 14193.15,9290 14448.15,9035 15637.92,9035 15659.4,9056.49 15659.4,9062.22 15669.72,9072.54 SW4.3@15675.46,9072.54
  Top Layer 1 w10: SW4.3@15675.46,9072.54 v1(15717.68,9072.54)
NetR8_2: R8.2 SW8.1 | length 155.9
  Top Layer 1 w5: R8.2@13978.15,9270 13985.51,9262.64 13985.51,9122.51 13981.69,9118.69
NetR72_1: R72.1 SW1.3 | length 2602.2
  Top Layer 1 w5: R72.1@16895.79,9260 16908.05,9259.15 v1(16968.15,9255) ; SW1.3@19582.58,9073.5 19597.79,9073.94 v1(19635,9075)
  Layer 3 w5: 17165,9255 19399.8,9075.02 ccw(c19400.2,9080) 19400.2,9075 v1(19635,9075)
NetR72_2: R72.2 SW5.1 | length 143.8
  Top Layer 1 w10: SW5.1@16849.12,9116.81 16850.51,9118.2 R72.2@16850.51,9260
NetR73_1: R73.1 SW2.3 | length 1062.2
  Top Layer 1 w5: SW2.3@20407.69,9073.5 20408.16,9073.03 v1(20455.95,9073.03)
  Top Layer 1 w10: R73.1@19555.28,9260 19780,9260 v1(19960,9080)
  Layer 2 w5: v1(19960,9080) 20190,9080 20240,9030 20412.92,9030 v1(20455.95,9073.03)
NetR73_2: R73.2 SW1.1 | length 143.4
  Top Layer 1 w10: R73.2@19510,9260 19510,9117.34 SW1.1@19510.53,9116.81
NetR74_1: R74.1 SW3.3 | length 956.5
  Top Layer 1 w10: R74.1@20385.28,9260 20450,9260 20670,9040 21200.96,9040 21219.24,9058.28 21219.24,9062.22 21230.52,9073.5 SW3.3@21234.46,9073.5
NetR74_2: R74.2 SW2.1 | length 145
  Top Layer 1 w5: SW2.1@20335.64,9116.81 20340,9121.17 R74.2@20340,9260
NetR75_1: R75.1 SW7.3 | length 3625.4
  Top Layer 1 w5: SW7.3@18184.11,10218.18 18184.11,10214.24 18195.39,10202.97 18199.32,10202.97 18213.15,10189.14 18213.15,9890 18643.15,9460 v1(18643.15,9260)
  Top Layer 1 w10: R75.1@21205.28,9260 v1(21260,9260)
  Layer 2 w5: 18840,9260 v1(21260,9260)
NetR75_2: R75.2 SW3.1 | length 144.2
  Top Layer 1 w10: R75.2@21160,9260 21160,9119.22 SW3.1@21162.41,9116.81
NetR77_1: R77.1 SW6.3 | length 1072
  Top Layer 1 w5: R77.1@17983.15,10192.64 17992.46,10204.9 18193.23,10554.69 ccw(c18110.55,10602.23) 18205.92,10602.32 18205.39,11146.45 ccw(c18197.89,11146.44) 18205.14,11148.34 18195.39,11185.56 SW6.3@18184.11,11200.77
NetR77_2: R77.2 SW7.1 | length 158.2
  Top Layer 1 w5: R77.2@17983.15,10147.36 18139.57,10147.36 SW7.1@18140.8,10146.13
NetR103_2: R103.2 R104.1 | length 61.8
  Top Layer 1 w10: R103.2@15301.2,12172.11 15306.2,12177.11 R104.1@15360.93,12177.11
NetR139_2: R139.2 R140.1 | length 55.3
  Top Layer 1 w10: R139.2@15065,12172.48 15065.67,12171.81 R140.1@15120,12171.81
O\0\_IC101: IC11_IC101.2 R48_IC101.1 | length 466.1
  Top Layer 1 w5: v4(18887.72,11373.82) R48_IC101.1@18931.53,11373.82 ; v4(19252.72,11373.82) IC11_IC101.2@19310,11373.82
  Layer 3 w5: v4(18887.72,11373.82) v4(19252.72,11373.82)
O\0\_IC102: IC11_IC102.2 R48_IC102.1 | length 466.1
  Top Layer 1 w5: v4(20227.28,11393.82) R48_IC102.1@20271.1,11393.82 ; v4(20592.28,11393.82) IC11_IC102.2@20649.57,11393.82
  Layer 3 w5: v4(20227.28,11393.82) v4(20592.28,11393.82)
O\0\_IC103: IC11_IC103.2 R48_IC103.1 | length 428.8
  Top Layer 1 w5: v4(18940,9793.82) R48_IC103.1@18983.82,9793.82 ; v4(19267.72,9793.82) IC11_IC103.2@19325,9793.82
  Layer 3 w5: v4(18940,9793.82) v4(19267.72,9793.82)
O\0\_IC104: IC11_IC104.2 R48_IC104.1 | length 466.1
  Top Layer 1 w5: v4(20227.28,9793.82) R48_IC104.1@20271.1,9793.82 ; v4(20592.28,9793.82) IC11_IC104.2@20649.57,9793.82
  Layer 3 w5: v4(20227.28,9793.82) v4(20592.28,9793.82)
O\0\_IC105: IC11_IC105.2 R48_IC105.1 | length 466.1
  Top Layer 1 w5: v4(13218.15,9858.82) R48_IC105.1@13261.97,9858.82 ; v4(13583.15,9858.82) IC11_IC105.2@13640.43,9858.82
  Bottom 6+gnd w5: v4(13218.15,9858.82) v4(13583.15,9858.82)
O\1\_IC101: IC11_IC101.4 R47_IC101.1 | length 420
  Top Layer 1 w5: R47_IC101.1@18931.53,11428.82 18931.53,11426.85 18945.77,11412.62 18946.52,11412.62 18956.52,11402.62 19020.32,11402.62 19061.81,11444.11 19262.58,11444.11 19292.28,11473.82 IC11_IC101.4@19310,11473.82
O\1\_IC102: IC11_IC102.4 R47_IC102.1 | length 420
  Top Layer 1 w5: R47_IC102.1@20271.1,11448.82 20271.1,11446.85 20285.33,11432.62 20286.09,11432.62 20296.09,11422.62 20359.89,11422.62 20401.38,11464.11 20602.15,11464.11 20631.85,11493.82 IC11_IC102.4@20649.57,11493.82
O\1\_IC103: IC11_IC103.4 R47_IC103.1 | length 382.7
  Top Layer 1 w5: R47_IC103.1@18983.82,9848.82 18983.82,9846.85 18998.05,9832.62 18998.8,9832.62 19008.8,9822.62 19236.08,9822.62 19307.28,9893.82 IC11_IC103.4@19325,9893.82
O\1\_IC104: IC11_IC104.4 R47_IC104.1 | length 420
  Top Layer 1 w5: R47_IC104.1@20271.1,9848.82 20271.1,9846.85 20285.33,9832.62 20286.09,9832.62 20296.09,9822.62 20359.89,9822.62 20401.38,9864.11 20562.58,9864.11 20592.28,9893.82 IC11_IC104.4@20649.57,9893.82
O\1\_IC105: IC11_IC105.4 R47_IC105.1 | length 420
  Top Layer 1 w5: R47_IC105.1@13261.97,9913.82 13261.97,9911.85 13276.2,9897.62 13276.95,9897.62 13286.95,9887.62 13350.75,9887.62 13392.25,9929.11 13593.01,9929.11 13622.72,9958.82 IC11_IC105.4@13640.43,9958.82
O\2\_IC101: IC11_IC101.6 R49_IC101.1 | length 439.3
  Top Layer 1 w5: R49_IC101.1@18931.53,11628.82 18933.56,11630.84 18933.56,11652.09 18941.15,11659.68 19000.28,11659.68 19061.14,11598.82 19134.48,11598.82 19159.48,11573.82 IC11_IC101.6@19310,11573.82
O\2\_IC102: IC11_IC102.6 R49_IC102.1 | length 439.3
  Top Layer 1 w5: R49_IC102.1@20271.1,11648.82 20273.13,11650.84 20273.13,11672.09 20280.72,11679.68 20339.85,11679.68 20400.71,11618.82 20474.05,11618.82 20499.05,11593.82 IC11_IC102.6@20649.57,11593.82
O\2\_IC103: IC11_IC103.6 R49_IC103.1 | length 420.7
  Top Layer 1 w5: R49_IC103.1@18983.82,10048.82 18985.84,10050.84 18985.84,10072.09 18993.43,10079.68 19052.56,10079.68 19065,10067.25 19065,10036.75 19070.91,10030.84 19070.91,10029.43 19081.52,10018.82 19149.48,10018.82 19174.48,9993.82 IC11_IC103.6@19325,9993.82
O\2\_IC104: IC11_IC104.6 R49_IC104.1 | length 439.3
  Top Layer 1 w5: R49_IC104.1@20271.1,10048.82 20273.13,10050.84 20273.13,10072.09 20280.72,10079.68 20339.85,10079.68 20400.71,10018.82 20474.05,10018.82 20499.05,9993.82 IC11_IC104.6@20649.57,9993.82
O\2\_IC105: IC11_IC105.6 R49_IC105.1 | length 439.3
  Top Layer 1 w5: R49_IC105.1@13261.97,10113.82 13263.99,10115.84 13263.99,10137.09 13271.58,10144.68 13330.71,10144.68 13391.58,10083.82 13464.91,10083.82 13489.91,10058.82 IC11_IC105.6@13640.43,10058.82
PH_LOUT1_11: J4.1 J4.3 PJ1.26 | length 1139.5
  Unused w20: v1(14560,12450) 14784.83,12450 PJ1.26@14786.24,12448.59
  Layer 3 w20: v1(14560,12450) 14560,11867.48 v1(14700,11727.48)
  Bottom 6+gnd w10: J4.3@14630,11738.74 14688.74,11738.74 v1(14700,11727.48) 14700,11670
PH_LOUT2_11: J4.7 J4.8 PJ1.6 | length 974.6
  Unused w20: v1(14635,12575) 14757.18,12575 PJ1.6@14758.68,12576.5
  Layer 3 w20: v1(14635,12575) 14635,11981.81 v1(14700.91,11915.91)
  Bottom 6+gnd w10: J4.7@14630,11896.22 14681.22,11896.22 v1(14700.91,11915.91) 14720.59,11935.59 J4.8@14777.64,11935.59
PH_ROUT1_11: J4.5 J4.6 PJ1.24 | length 1270.1
  Unused w20: v1(14595,12705) 14779.83,12705 PJ1.24@14786.24,12698.59
  Layer 3 w20: v1(14595,12705) 14595,11920 v1(14685,11830)
  Bottom 6+gnd w10: J4.5@14630,11817.48 14631.11,11818.59 14673.59,11818.59 v1(14685,11830) 14711.85,11856.85 J4.6@14777.64,11856.85
PH_ROUT2_11: J4.9 J4.10 PJ1.4 | length 1107
  Unused w20: v1(14675,12830) 14755.18,12830 PJ1.4@14758.68,12826.5
  Layer 3 w20: v1(14675,12830) 14675,12145 14721.24,12098.76 v1(14721.24,11991.24)
  Bottom 6+gnd w10: J4.9@14630,11974.96 14704.96,11974.96 v1(14721.24,11991.24) 14737.52,12007.52 14770.83,12007.52 J4.10@14777.64,12014.33
SAI1_FS: IC2.3 R143.1 | length 2800.4
  Top Layer 1 w5: v1(14656.48,11190.89) 14657.05,11190.32 14706.58,11190.32 IC2.3@14707.15,11189.75
  Layer 3 w5: v1(14656.48,11190.89) 14656.48,11193.19 14813.26,11349.97 ; 15010.11,11349.97 15010.11,11920.31 15288.84,12199.04 16425.96,12199.04 16577.52,12047.48 16593.86,12047.48 16593.86,12064.16 16605,12075.3 16605,12080.86 16610,12085.86 16610,12105.86 16626.5,12122.36 16642.5,12122.36 16669.86,12095 v1(16670,12095)
  Bottom 6+gnd w5: v1(16670,12095) R143.1@16670,12144.72
SAI1_MCLK: IC2.1 R145.1 | length 2621.9
  Top Layer 1 w5: v1(14656.48,11230.26) 14657.05,11229.69 14706.58,11229.69 IC2.1@14707.15,11229.12
  Layer 3 w5: v1(14656.48,11230.26) 14722.08,11295.85 14729.72,11295.85 14793.26,11359.39 ; 14990.11,11359.39 14990.11,11928.6 15280.56,12219.04 16455.96,12219.04 v1(16580,12095)
  Bottom 6+gnd w5: v1(16580,12095) R145.1@16580,12144.72
SAI1_SCK: IC2.4 R144.1 | length 2801.3
  Top Layer 1 w5: v1(14634.67,11170.65) 14634.96,11170.35 14706.86,11170.35 IC2.4@14707.15,11170.06
  Layer 3 w5: v1(14634.67,11170.65) 14636.73,11172.71 14660.04,11172.71 14736.63,11249.29 14736.63,11259.2 14823.26,11345.83 ; 15020.11,11345.83 15020.11,11916.17 15292.98,12189.04 16420.96,12189.04 16584.4,12025.6 16602.07,12025.6 16605,12028.53 16605,12045 16625.37,12065.37 v1@16625.37,12094.63
  Bottom 6+gnd w5: R144.1@16625,12144.72 16625,12095.37 v1(16625.37,12095)
SAI1_SD_A: IC2.5 R141.1 | length 2880.1
  Top Layer 1 w5: v1(14656.48,11151.52) 14657.05,11150.95 14706.58,11150.95 IC2.5@14707.15,11150.38
  Layer 3 w5: v1(14656.48,11151.52) 14746.63,11241.66 14746.63,11255.05 14833.26,11341.69 ; 15030.11,11341.69 15030.11,11912.03 15297.12,12179.04 16416.56,12179.04 16580,12015.6 16622.17,12015.6 16649.98,12043.41 16657.58,12043.41 16666.59,12052.42 16666.59,12060.02 16686.57,12080 16745,12080 v1(16760,12095)
  Bottom 6+gnd w5: v1(16760,12095) R141.1@16760,12144.72
SAI1_SD_B: IC2.2 R142.1 | length 2874.5
  Top Layer 1 w5: v1(14634.67,11210.02) 14634.96,11209.72 14706.86,11209.72 IC2.2@14707.15,11209.43
  Layer 3 w5: v1(14634.67,11210.02) 14636.73,11212.08 14660.08,11212.08 14803.26,11355.25 ; 15000.11,11355.25 15000.11,11924.45 15284.7,12209.04 16440.96,12209.04 16495,12155 16497.16,12155 16583.86,12068.3 16595,12079.44 16595,12085 16600,12090 16600,12110 16624.65,12134.65 16652.42,12134.65 16655.35,12131.72 16655.35,12123.65 16668.63,12110.37 16699.63,12110.37 16714.63,12095.37 v1(16715,12095.37)
  Bottom 6+gnd w5: v1(16715,12095.37) R142.1@16715,12144.72
SAI2_SD_A: IC2.80 R146.1 | length 3622.7
  Top Layer 1 w5: v1(15498.15,10678.82) 15499.03,10677.94 IC2.80@15552.67,10677.94
  Unused w5: v1(15498.15,10678.82) 15443.15,10678.82 15378.15,10613.82 14863.15,10613.82 14844.17,10632.8 14844.17,11143.49 14813.15,11174.51 14813.15,11232.7 14828.46,11248.02 14828.46,11264.55 14833.03,11264.55 14838.48,11270 14853.15,11270 14967.72,11384.57 15033.4,11384.57 15040.77,11377.19 15104.48,11377.19 15162.29,11435 15312.29,11435 15373.47,11373.82 15946.11,11373.82 16052.29,11480 16152.29,11480 16308.15,11635.86 ; v1(16485,12060) 16485,12050 16505,12030 16505,11635.86
  Bottom 6+gnd w5: v1(16485,12060) 16535,12110 R146.1@16535,12144.72
SAI2_SD_B: IC2.34 R147.1 | length 3025.4
  Top Layer 1 w5: IC2.34@14707.15,10579.51 14756.54,10579.51 14766.85,10589.82 v1(14766.85,10590.1)
  Unused w5: v1(14766.85,10590.1) 14834.17,10657.42 14834.17,11122.8 14798.15,11158.82 14798.15,11231.84 14818.46,11252.16 14818.46,11278.33 14832.67,11278.33 14834.34,11280 14844.63,11280 14961.74,11397.11 15051.72,11397.11 15061.64,11387.19 15100.34,11387.19 15158.15,11445 15316.43,11445 15377.62,11383.82 15941.97,11383.82 16048.15,11490 16148.15,11490 16298.15,11640 ; v1(16460.12,12066.62) 16461.39,12065.35 16461.39,12051.75 16495,12018.13 16495,11640
  Bottom 6+gnd w5: v1(16460.12,12066.62) 16460.12,12114.84 16477.74,12132.46 16480.69,12132.46 16490,12141.77 R147.1@16490,12144.72
SD_CK: H4.5 IC1.113 | length 2676
  Top Layer 1 w5: IC1.113@16703.9,11311.57 16704.57,11312.24 16704.57,11359.67 v1(16705.24,11360.34)
  Unused w5: v1(16705.24,11360.34) 16778.14,11360.34 16882.29,11464.5 16964.14,11464.5 17463.28,11963.64 ; 17660.13,11963.64 18054.14,11963.64 18230,12139.5 18230,12960 H4.5@18340,13070
SD_CMD: H4.6 IC1.116 | length 2835.8
  Top Layer 1 w5: IC1.116@16644.84,11311.57 16645.04,11311.77 16645.04,11366.99 v1(16645.26,11367.21)
  Unused w5: v1(16645.26,11367.21) 16647.32,11369.27 16652.83,11369.27 16653.56,11370 16693.15,11370 16698.87,11375.71 16711.6,11375.71 16716.98,11370.34 16773.49,11370.34 16882.59,11479.44 16964.94,11479.44 17459.14,11973.64 ; 17655.99,11973.64 18050,11973.64 18220,12143.64 18220,13050 H4.6@18340,13170
SD_D0: H4.1 IC1.98 | length 2640.3
  Top Layer 1 w5: v1(16728.42,11236.65) 16727.25,11235.49 16727.25,11208.83 16744.17,11191.91 16744.17,11105.83 16807.26,11042.74 16831.5,11042.74 16837.78,11036.46 IC1.98@16860.91,11036.46
  Unused w5: v1(16728.42,11236.65) 16731.38,11236.65 16749.82,11218.22 16752.45,11218.22 16755.33,11215.35 16757.94,11215.35 16761.78,11219.19 16763.52,11219.19 16786.16,11241.83 16791.6,11241.83 16800.61,11250.84 16800.61,11263.57 16789.12,11275.06 16789.12,11310.11 16891.08,11412.07 16970.5,11412.07 17480.5,11922.07 ; 17677.35,11922.07 18050,11922.07 18051.57,11923.64 18070.71,11923.64 18271.57,12124.5 18271.57,12601.57 H4.1@18340,12670
SD_D1: H4.2 IC1.99 | length 2641.6
  Top Layer 1 w5: v1(16756.18,11233.59) 16755.33,11232.74 16755.33,11212.74 16752.78,11210.19 16752.78,11197.45 16755.33,11194.9 16755.33,11108.81 16801.72,11062.42 16831.5,11062.42 16837.78,11056.14 IC1.99@16860.91,11056.14
  Unused w5: v1(16756.18,11233.59) 16769.86,11247.27 16769.86,11305 16895.65,11430.78 16972.85,11430.78 17475.71,11933.64 ; 17672.56,11933.64 18066.57,11933.64 18260,12127.07 18260,12690 H4.2@18340,12770
SD_D2: H4.3 IC1.111 | length 2518.9
  Top Layer 1 w5: IC1.111@16743.27,11311.57 16743.27,11270.42 v1(16754.4,11259.28)
  Unused w5: v1(16754.4,11259.28) 16754.4,11303.68 16891.94,11441.21 16969.14,11441.21 17471.57,11943.64 ; 17668.42,11943.64 18062.43,11943.64 18250,12131.21 18250,12780 H4.3@18340,12870
SD_D3: H4.4 IC1.112 | length 2623.2
  Top Layer 1 w5: IC1.112@16723.58,11311.57 16724.41,11310.75 16724.41,11263.03 v1(16725.24,11262.2)
  Unused w5: v1(16725.24,11262.2) 16725.24,11292.09 16886.79,11453.64 16967.42,11453.64 17467.42,11953.64 ; 17664.28,11953.64 18058.28,11953.64 18240,12135.36 18240,12870 H4.4@18340,12970
SD_DETECT: H1.1 IC1.102 | length 3259.9
  Top Layer 1 w5: v1(16768.15,11203.82) 16768.15,11158.82 16808.15,11118.82 16811.06,11118.82 16813.68,11116.2 16859.9,11116.2 IC1.102@16860.91,11115.2
  Top Layer 1 w10: v1(18294.31,12541.7) 19026.52,12541.7 H1.1@19154.81,12669.99
  Unused w5: v1(16768.15,11203.82) 16778.15,11213.82 16789.5,11213.82 16794.16,11209.15 16806.9,11209.15 16815.91,11218.16 16815.91,11230.89 16813.15,11233.65 16813.15,11320 16893.15,11400 16975.5,11400 17485.5,11910 ; 17682.35,11910 18071.21,11910 18283.64,12122.43 18283.64,12500 18284,12500 18294.31,12510.31 v1(18294.31,12541.7)
SDCKE_0_6: IC1.29 U1.37 | length 2696.1
  Top Layer 1 w5: IC1.29@16015.39,10682.13 v1@16094.14,10682.1 ; U1.37@16302.17,9775.59 v1@16302.17,9837.43 ; U1.37@16302.41,9775.83 v1(16302.41,9837.68) ; U1.37@16302.66,9775.59 v1@16302.66,9837.43
  Layer 3 w5: 16049.82,9678.13 16018.42,9678.24 ; 16049.85,9678.13 16284.68,9677.96 ; v1(16094.16,10682.08) 16094.16,10643.82 16094.13,10575.75 ; 16284.67,9677.96 ccw(c16284.68,9682.96) 16288.16,9679.38 ; 16288.19,9679.4 16318.15,9709.36 16318.15,9819.87 ; v1(16302.41,9837.68) 16316.69,9823.35 cw(c16313.15,9819.82) 16318.15,9819.91 ; 15981.72,10459.23 cw(c15986.72,10459.2) 15983.14,10462.69 ; 15981.72,10459.23 cw(c15986.72,10459.2) 15983.14,10462.68 ; 15981.72,10459.23 cw(c15986.72,10459.2) 15983.14,10462.68 ; 15981.72,10459.23 cw(c15986.72,10459.2) 15983.14,10462.68 ; 15981.72,10459.23 cw(c15986.72,10459.2) 15983.14,10462.68 ; 15981.72,10459.23 cw(c15986.72,10459.2) 15983.14,10462.68 ; 15981.72,10459.23 cw(c15986.72,10459.2) 15983.14,10462.68 ; 15981.72,10459.23 cw(c15986.72,10459.2) 15983.14,10462.68 ; 15981.72,10459.23 cw(c15986.72,10459.2) 15983.14,10462.68 ; 15981.72,10459.23 cw(c15986.72,10459.2) 15983.14,10462.68 ; 15981.72,10459.23 cw(c15986.72,10459.2) 15983.14,10462.68 ; 15981.72,10459.23 cw(c15986.72,10459.2) 15983.14,10462.68 ; 15981.72,10459.23 cw(c15986.72,10459.2) 15983.14,10462.68 ; 15981.72,10459.23 cw(c15986.72,10459.2) 15983.14,10462.68 ; 15981.72,10459.23 cw(c15986.72,10459.2) 15983.14,10462.68 ; 15981.72,10459.23 cw(c15986.72,10459.2) 15983.14,10462.68 ; 15981.72,10459.23 15981.7,10454.58 ccw(c15996.7,10454.49) 15981.7,10454.49 15981.7,10450.32 15983.2,9713.54 ; 15983.16,10462.71 16092.7,10572.24 ; 15983.2,9713.55 ccw(c16018.57,9713.62) 16018.42,9678.24 ; 15983.2,9713.55 ccw(c16018.57,9713.62) 16018.42,9678.24 ; 15983.2,9713.55 ccw(c16018.57,9713.62) 16018.42,9678.24 ; 15983.2,9713.55 ccw(c16018.57,9713.62) 16018.42,9678.24 ; 15983.2,9713.55 ccw(c16018.57,9713.62) 16018.42,9678.24 ; 15983.2,9713.55 ccw(c16018.57,9713.62) 16018.42,9678.24 ; 15983.2,9713.55 ccw(c16018.57,9713.62) 16018.42,9678.24 ; 15983.2,9713.55 ccw(c16018.57,9713.62) 16018.42,9678.24 ; 15983.2,9713.55 ccw(c16018.57,9713.62) 16018.42,9678.24 ; 15983.2,9713.55 ccw(c16018.57,9713.62) 16018.42,9678.24 ; 15983.2,9713.55 ccw(c16018.57,9713.62) 16018.42,9678.24 ; 15983.2,9713.55 ccw(c16018.57,9713.62) 16018.42,9678.24 ; 15983.2,9713.55 ccw(c16018.57,9713.62) 16018.42,9678.24 ; 15983.2,9713.55 ccw(c16018.57,9713.62) 16018.42,9678.24 ; 15983.2,9713.55 ccw(c16018.57,9713.62) 16018.42,9678.24 ; 15983.2,9713.55 ccw(c16018.57,9713.62) 16018.42,9678.24 ; 16092.72,10572.27 ccw(c16089.13,10575.75) 16094.13,10575.75 ; 16092.72,10572.27 ccw(c16089.13,10575.75) 16094.13,10575.75 ; 16092.72,10572.27 ccw(c16089.13,10575.75) 16094.13,10575.75 ; 16092.72,10572.27 ccw(c16089.13,10575.75) 16094.13,10575.75 ; 16092.72,10572.27 ccw(c16089.13,10575.75) 16094.13,10575.75 ; 16092.72,10572.27 ccw(c16089.13,10575.75) 16094.13,10575.75 ; 16092.72,10572.27 ccw(c16089.13,10575.75) 16094.13,10575.75 ; 16092.72,10572.27 ccw(c16089.13,10575.75) 16094.13,10575.75